# Altium PCB PCB1.PcbDoc
Units mm, origin at the board's own origin, x right, y up, seen from the top; angles counter-clockwise.
Board outline 152.4 x 101.6 mm, 2 copper layers (Top Layer, Bottom Layer); 23 components, 17 nets, 91 pads, 10 vias.
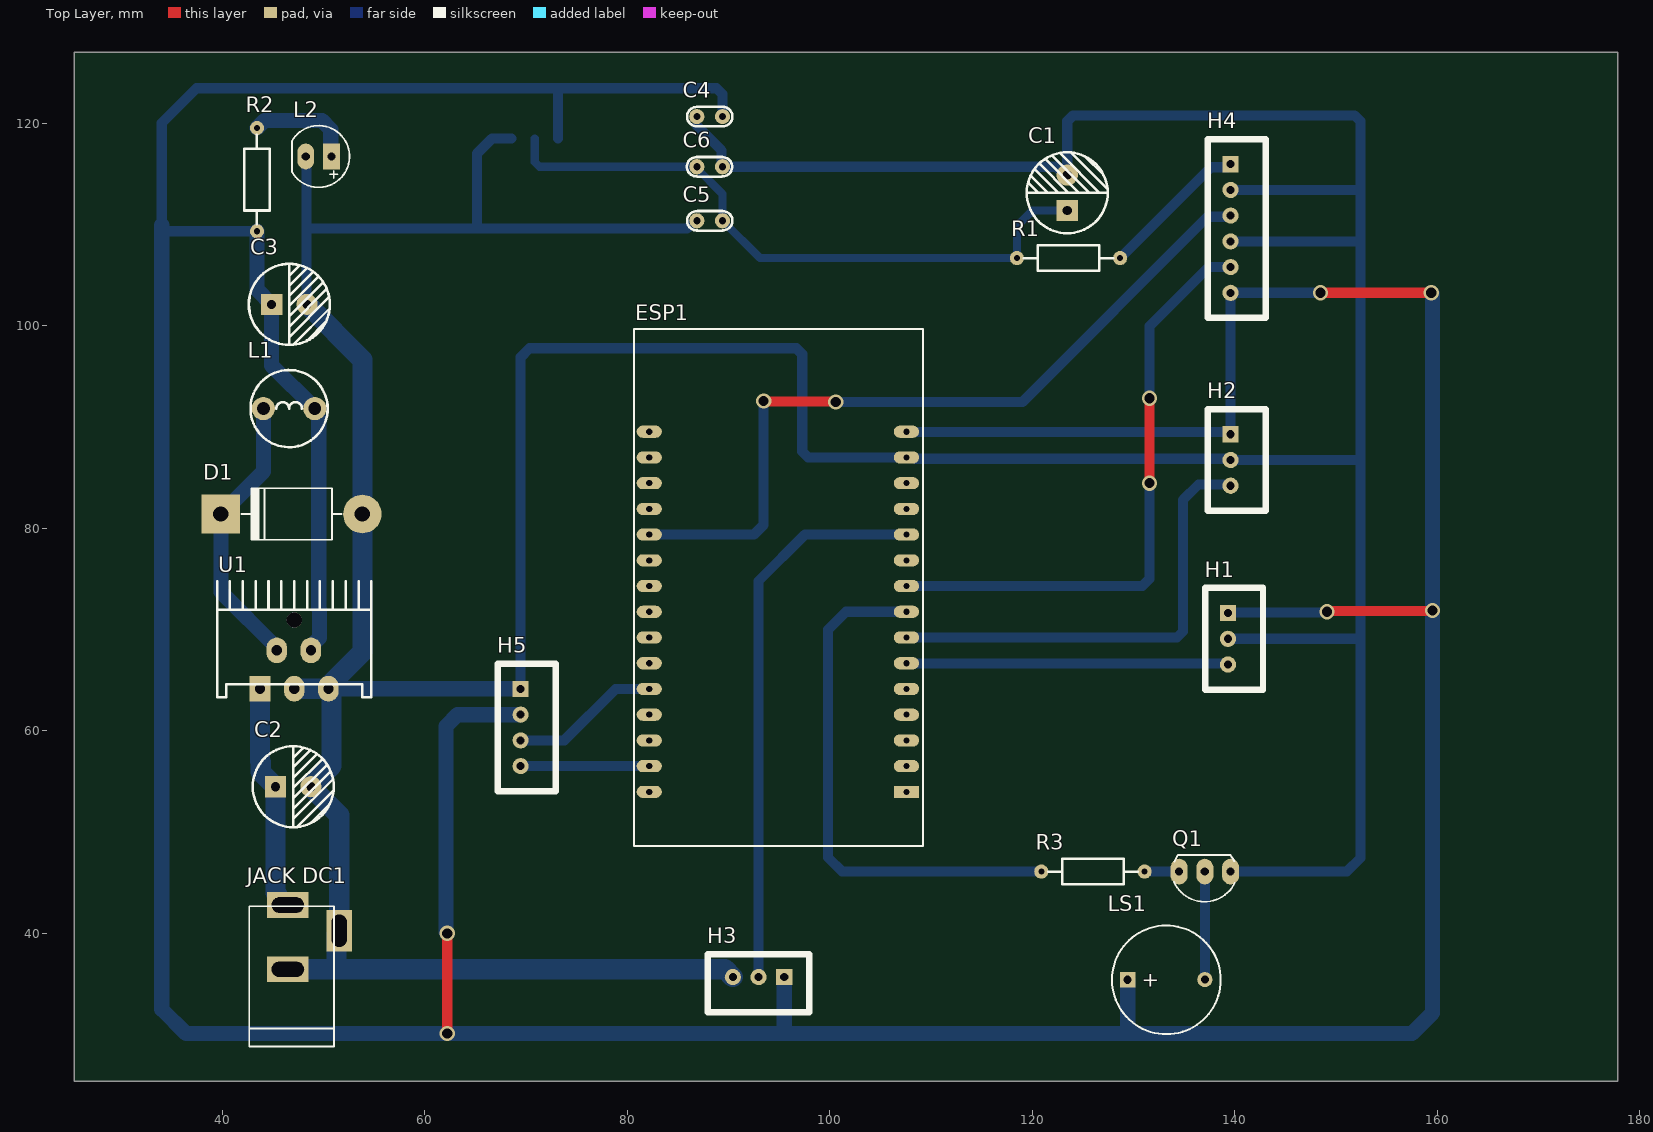
[diagram p0: Top Layer view]
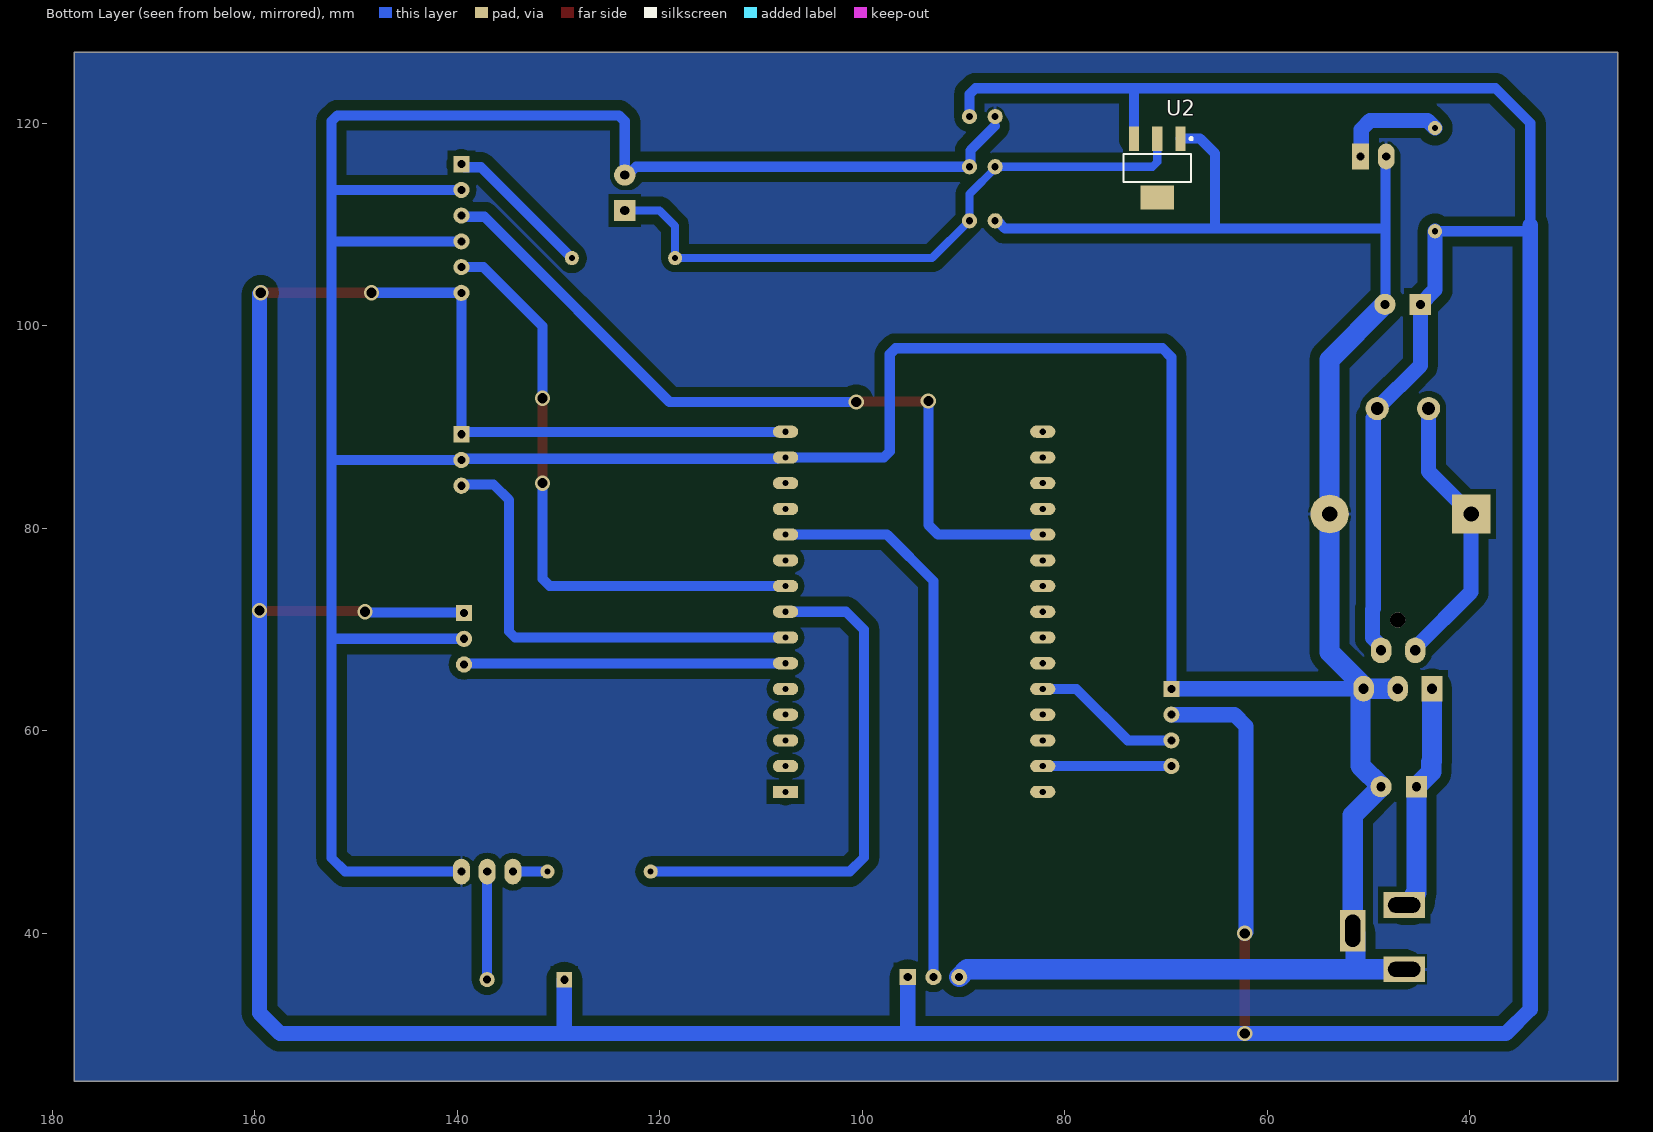
[diagram p1: Bottom Layer view, seen from below]
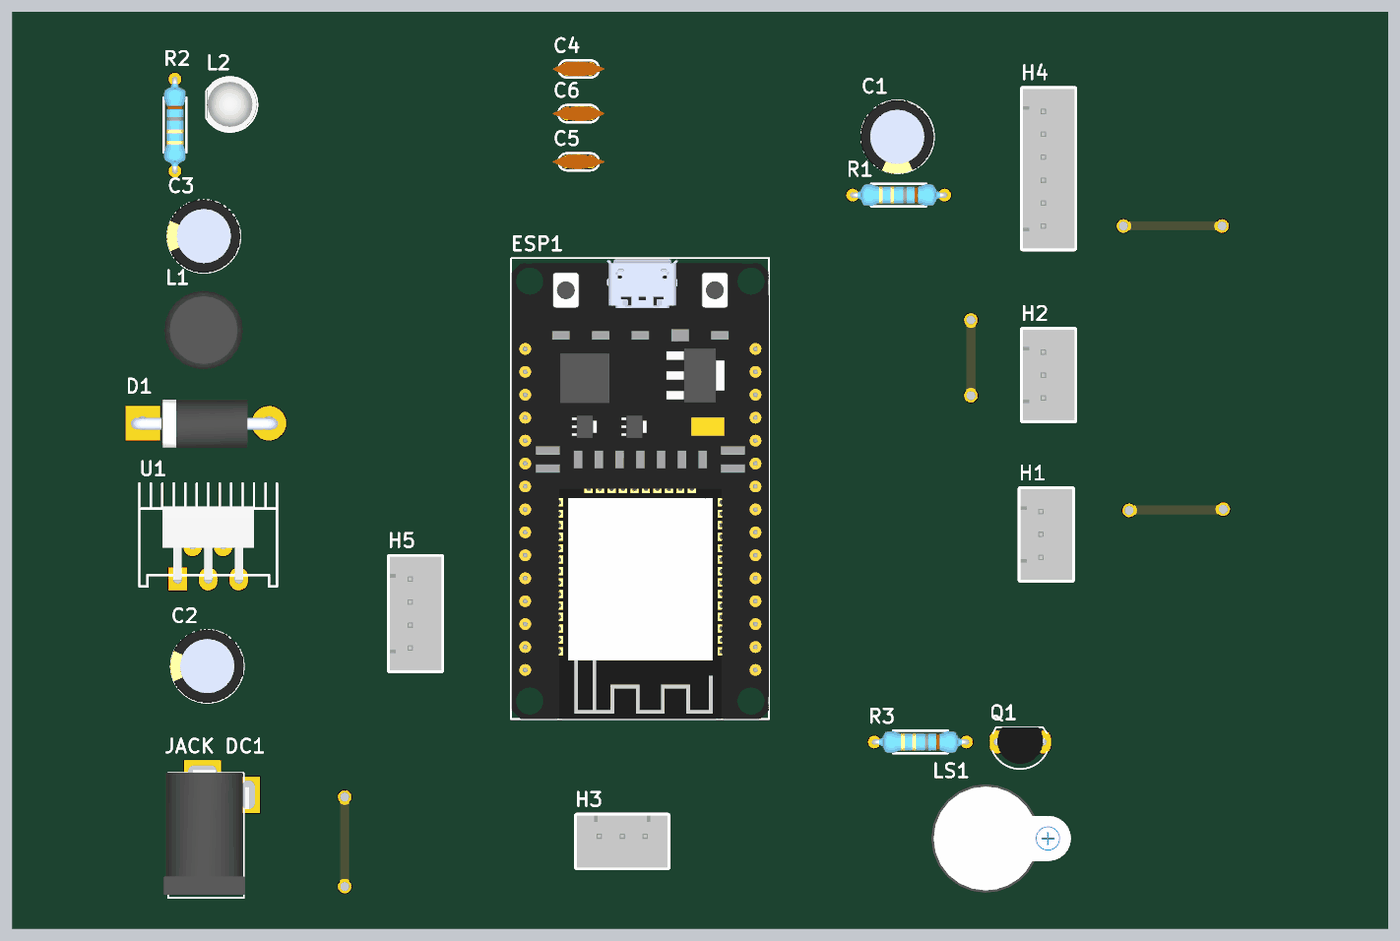
[diagram p2: 3D render of the assembled board from above, using the file's embedded part models]

## Layer stack, top to bottom
Top Solder: solder mask 0.0102, Solder Resist, Dk 3.5
Top Layer: signal copper 0.0356
Dielectric 1: dielectric 0.32, FR-4, Dk 4.8
Bottom Layer: signal copper 0.0356
Bottom Solder: solder mask 0.0102, Solder Resist, Dk 3.5

## Board outline
25.4,25.4 177.8,25.4 177.8,127 25.4,127

## Design rules (kind name [scope] priority, off if disabled: settings)
Clearance [All] p1: gap=1 ignorepadtopadclearanceinfootprint=FALSE except(0.6: Arc-SMDPad Arc-THPad Track-SMDPad Track-THPad SMDPad-SMDPad SMDPad-THPad SMDPad-Via SMDPad-Fill SMDPad-Poly SMDPad-Region THPad-THPad THPad-Via THPad-Fill THPad-Poly THPad-Region)
PolygonConnect [All] p1: connectstyle=Relief reliefconductorwidth=0.254 reliefentries=4 polygonreliefangle="90 Angle" airgapwidth=0.254
RoutingVias [All] p1: holewidth=1 width=2 viastyle="Through Hole" minholewidth=1 minwidth=2 maxholewidth=1 maxwidth=2
SolderMaskExpansion [All] p1: expansion=0.102 istentingtop=FALSE
Width 3.3V [InNet('+3.3')] p1: maxlimit=0.8 minlimit=0.8 preferedwidth=0.8
Width 5V [InNet('+5')] p2: maxlimit=1.5 minlimit=1 preferedwidth=1.5
Width 12V [InNet('+12')] p3: maxlimit=2 minlimit=1.5 preferedwidth=2
Width GND [InNet('GND')] p4: maxlimit=2 minlimit=1 preferedwidth=1.5
Width [All] p5: maxlimit=1.5 minlimit=1 preferedwidth=1.5
30 further rules are at their usual default settings.

## Components (designator, comment, footprint, x,y, rotation, side; value= is the part's Value field where it differs from the comment)
C1 "100uF" "tu hoa 8mm" 123.444,113.129 r90 top
C2 "470uF" "tu hoa 8mm" 47.018,54.483 r0 top
C3 "100uF" "tu hoa 8mm" 46.637,102.108 r0 top
C4 "104" "tu gom" 88.138,120.65 r180 top
C5 "104" "tu gom" 88.138,110.363 r180 top
C6 "104" "tu gom" 88.138,115.697 r0 top
D1 "1N5408" D5A 39.878,81.407 r0 top
ESP1 "ESP32 DEVKIT" "ESP32 WROOM 32 KIT" 107.569,53.975 r180 top
H1 "MP135" XH2.54M-3 139.319,71.628 r270 top
H2 "RAIN" XH2.54M-3 139.573,89.281 r270 top
H3 "DHT22" XH2.54M-3 95.504,35.687 r180 top
H4 "CAM_BIEN_BUI" XH2.54M-6 139.573,115.951 r270 top
H5 "LCD" XH2.54M-4 69.469,64.135 r270 top
"JACK DC1" "JACK DC 5.5" "JACK DC 5.5" 49.022,39.624 r90 top value="Jac DC"
L1 "100uH 3A" "CUON CAM 100uH3A" 46.609,91.821 r0 top
L2 "LED 5mm" LED-5MM-RED 50.8,116.713 r180 top
LS1 "Coi Chip Speaker" "Coi Chip Speacker" 129.413,35.42 r0 top
Q1 "C1815" TO92 137.033,46.101 r180 top value=C9014
R1 "330R" "tro vach 1/4w" 123.571,106.68 r0 top
R2 "330R" "tro vach 1/4w" 43.434,114.427 r90 top
R3 "1k" "tro vach 1/4w" 125.984,46.101 r0 top
U1 "LM2596T-5.0" LM2576t 47.092,68.402 r0 top
U2 "LM1117-3.3V" SOT223-4N 70.866,115.57 r270 bottom

## Footprints (in the part's own frame and the unit in brackets; to place one, negate y for a bottom-side part, rotate by r counter-clockwise, add the part's x,y. Pads: shape width x height; smd on the part's side, far side on the other; paste and mask are expansions set on the pad)
"Coi Chip Speacker" [mm]
  rect 1.5x1.5 hole 0.8: 1(0,0)
  round 1.5 hole 0.8: 2(7.62,0.013)
  silkscreen extent -1.55,-5.38 9.18,5.36, body extent -2.22,-6 13.24,6, height 4.5
"CUON CAM 100uH3A" [mil] "100uH3A"
  round 90 hole 50: 1(-100,0) 2(100,0)
  silkscreen extent -150,-150 150,150, body extent -171,-175 171,167, height 394
D5A [mil] "Diode 5A, W 200mil, L 550mil"
  round 150 hole 60: 1(550,0)
  rect 150x150 hole 60: 2(0,0)
  silkscreen extent 80,-100 470,100, body extent -52,-106 590,103, height 254
"ESP32 WROOM 32 KIT" [mm]
  rect 2.5x1.2 hole 0.6: 1(0,0)
  oval 2.5x1.2 hole 0.6: 2(0,-2.54) 3(0,-5.08) 4(0,-7.62) 5(0,-10.16) 6(0,-12.7) 7(0,-15.24) 8(0,-17.78) 9(0,-20.32) 10(0,-22.86) 11(0,-25.4) 12(0,-27.94) 13(0,-30.48) 14(0,-33.02) 15(0,-35.56) 16(25.4,-35.56) 17(25.4,-33.02) 18(25.4,-30.48) 19(25.4,-27.94) 20(25.4,-25.4) 21(25.4,-22.86) 22(25.4,-20.32) 23(25.4,-17.78) 24(25.4,-15.24) 25(25.4,-12.7) 26(25.4,-10.16) 27(25.4,-7.62) 28(25.4,-5.08) 29(25.4,-2.54) 30(25.4,0)
  silkscreen extent -1.65,-45.72 26.92,5.33, body extent -1.65,-45.6 26.85,5.33, height 10.49
"JACK DC 5.5" [mm] "Jac DC input"
  rect 2.54x4.064 hole 1.5 slot 3.2 at 90 deg: 1(3.175,2.54) 2(-3.175,2.54)
  rect 4.064x2.54 hole 1.5 slot 3.2 at 0 deg: 3(0.635,-2.54)
  silkscreen extent -10.79,-2.03 3.05,6.35, body extent -10.42,-2.67 3.4,6.84, height 11.02
LED-5MM-RED [mil] "LED 2 PIN, 5 ly , Only colour,pin to pin 100mil"
  rect 65x100 hole 32: 1(0,0)
  oval 65x100 hole 32: 2(100,0)
  silkscreen extent -70,-120 154,120, body extent -65,-119 149,118, height 339
LM2576t [mil]
  rect 80x100 hole 40: 1(-132,-167.09)
  oval 80x100 hole 40: 2(-67,-18) 3(1,-167) 4(66,-18) 5(134,-167)
  round 59.06 hole 59.06: ""(1,100)
  silkscreen extent -299,-200 301,250, body extent -199,-175 201,150, height 859
SOT223-4N [mm] "SOT223, 4-Leads, Body 6.5x3.5mm, Pitch 2.3mm, Lead Span 7mm, IPC Medium Density"
  rect 2.4x1 smd: 1(-2.9,2.3) 2(-2.9,0) 3(-2.9,-2.3)
  rect 2.4x3.3 smd: 4(2.9,0)
  silkscreen extent -3.02,-3.35 1.4,3.47, body extent -3.39,-3.27 3.5,3.23, height 1.72
TO92 [mil] "TO-92"
  oval 66x100 hole 32: 1(-100,0) 2(0,0) 3(100,0)
  silkscreen extent -117,-65 120,118, body extent -109,-66 109,95, height 245
"tro vach 1/4w" [mm]
  round 1.4 hole 0.6: 1(-5.1,0) 2(5.1,0)
  silkscreen extent -4.39,-1.25 4.42,1.25, body extent -5.38,-1.2 5.38,1.2, height 2.41
"tu gom" [mm] "Tu gom mini"
  round 1.5 hole 0.7: 1(-1.27,0) 2(1.27,0)
  silkscreen extent -2.25,-0.97 2.22,0.97, body extent -2.92,-0.85 2.92,0.85, height 6.12
"tu hoa 8mm" [mm]
  rect 2.1x2.1 hole 0.9: 1(-1.75,0)
  round 2.1 hole 0.9: 2(1.75,0)
  silkscreen extent -4,-4 4,4, body extent -4.1,-4.07 4.1,4.13, height 13.81
XH2.54M-3 [mm]
  rect 1.6x1.6 hole 0.8: 1(0,0)
  round 1.6 hole 0.8: 2(2.54,0) 3(5.08,0)
  silkscreen extent -2.48,-2.26 7.56,3.46, body extent -2.48,-2.26 7.56,3.48, height 6.91
XH2.54M-4 [mm]
  rect 1.6x1.6 hole 0.8: 1(0,0)
  round 1.6 hole 0.8: 2(2.54,0) 3(5.08,0) 4(7.62,0)
  silkscreen extent -2.48,-2.26 10.1,3.46, body extent -2.48,-2.26 10.1,3.48, height 6.91
XH2.54M-6 [mm]
  rect 1.6x1.6 hole 0.8: 1(0,0)
  round 1.6 hole 0.8: 2(2.54,0) 3(5.08,0) 4(7.62,0) 5(10.16,0) 6(12.7,0)
  silkscreen extent -2.48,-2.26 15.18,3.46, body extent -2.48,-2.26 15.18,3.48, height 6.91

## Part data
C1 C3: library part "Tu Hoa 100uF 50V 8x11", "Cắm", Chung_Loai=Cắm, Don_Vi=Con, Ma_Hang=MH006872, So_Chan=2, Ten_Linh_Kien="Tụ Hóa 100uF 50V 8x11MM"
C2: library part "Tu Hoa 470uF 25V 8x13", "Cắm", Chung_Loai=Cắm, Don_Vi=Con, Ma_Hang="MH 470uF 25V", So_Chan=2, Ten_Linh_Kien="Tụ Hóa 470uF 25V"
C4 C5 C6: library part "Tu gom 104 50V", "Cắm", Chung_Loai=Cắm, Don_Vi=Con, Ma_Hang=MH004761, So_Chan=2, Ten_Linh_Kien="Tụ gốm 104 100nF 50V"
D1: library part D5A, "Diode 5A"
ESP1: library part "ESP32 WROOM 32 KIT"
H1 H2 H3: library part "Header 3P 2.54 Duc Thang", "Cắm", Chung_Loai=Cắm, Don_Vi=Con, Ma_Hang=MH001292, Ten_Linh_Kien="Header 3P XH2.54-3P Đực Thẳng"
H4: library part "Header 6P 2.54 Duc Thang", "Cắm", Chung_Loai=Cắm, Don_Vi=Con, Ma_Hang=MH001972, Ten_Linh_Kien="Header 6P XH2.54-6P Đực Thẳng"
H5: library part "Header 4P 2.54 Duc Thang", "Cắm", Chung_Loai=Cắm, Don_Vi=Con, Ma_Hang=MH001285, Ten_Linh_Kien="Header 4P XH2.54-4P Đực Thẳng"
L1: library part "CUON CAM 100uH DIP", "Dán", Chung_Loai=Dán, Don_Vi=Con, Ma_Hang=MH002209, Ten_Linh_Kien="Cuộn Cảm 100uH 3A 8x10MM"
L2: library part "LED 5mm Do", "Cắm", Chung_Loai=Cắm, Don_Vi=Con, Ma_Hang=MH008967, Ten_Linh_Kien="Led 5MM Phủ Đỏ (1000c)"
LS1: "Còi chip"
Q1: library part "Trans C1815 DIP", "NPN transistor"
R1 R2: library part "Tro Vach 1/4W 5% 330R", "Cắm", Chung_Loai=Cắm, Don_Vi=Con, Ma_Hang=MH007436, So_Chan=2, Ten_Linh_Kien="Trở Vạch 1/4W 5% 330R"
R3: library part "Tro Vach 1/4W 5% 1k", "Cắm", Chung_Loai=Cắm, Don_Vi=Con, Ma_Hang=MH007390, So_Chan=2, Ten_Linh_Kien="Trở Vạch 1/4w 5% 1k"
U1: library part LM2576T-5.0, "SIMPLE SWITCHER; 3A Step-Down Voltage Regulator", DigiKeyPartNumber=LM2576T-5.0-ND, Manufacturer="National Semiconductor", PackageTopMarking="NSUZXYTT*LM2576T*-5.0 P+", PowerWise=N, Code_JEDEC=TO-220-AB, ComponentLink1Description="LM2576 Datasheet", ComponentLink1URL=http://www.national.com/ds/LM/LM2576.pdf, ComponentLink2Description="LM2576 Web Page", ComponentLink2URL=http://www.national.com/pf/LM/LM2576.html, ComponentLink3Description="T05A Package Page", ComponentLink3URL=http://www.national.com/packaging/folders/t05a.html, CompType=Switcher, DatasheetVersion=Aug-2004, FirstPublished=4-Dec-2008, PackageDescription="TO-220, Molded, 5 Lead, Straight", PackageReference=T05A, PackageVersion="revJ, Jan-1992", PartNumber=LM2576T-5.0, PinCount=5, Publisher="Altium Limited", RoHS=O
U2: library part LM1117, "800mA Low-Dropout Linear Regulator", Creator="Nguyen Ba Bien", Website=http://group3i.net

## Via types
v1: diameter 1.5, hole 1, Top Layer to Bottom Layer, 10 vias

## Nets (pads, with @x,y where several pads share a name; then routed paths per layer and width w, separated by ;. In a path a pad name is that pad's centre, name@x,y a point inside that pad or via, vN(x,y) a via of type N, cw(c..) or ccw(c..) an arc to the next point about the centre after c; other vN are vias at no path point)
+3.3: C1.1 C5.1 C6.1 R1.1 U2.2 | length 64.2
  Bottom Layer w0.8: U2.2 70.866,116.166 71.335,115.697 C6.1 ; C6.1@86.818,115.647 86.818,115.6 89.408,113.01 C5.1 93.091,106.68 R1.1 118.471,109.835 120.015,111.379 C1.1
+5: C3.1 C4.1 ESP1.15 H1.1 H2.1 H3.1 H4.6 H5.2 L1.2 LS1.1 R2.1 U1.4 U2.3 | length 538.5
  Top Layer w1: v1(62.23,30.099) v1(62.23,40.005) ; v1(148.463,103.251) v1(159.385,103.251) ; v1(149.098,71.755) 149.161,71.819 159.448,71.819 v1(159.512,71.882)
  Bottom Layer w1: R2.1 34.622,109.327 34.036,109.913 34.036,120.015 37.465,123.444 73.166,123.444 ; U2.3 73.166,123.444 ; C4.1 89.408,122.858 88.822,123.444 73.166,123.444 ; ESP1.15 107.607,89.497 H2.1@139.281,89.497 ; H2.1@139.192,89.408 H2.1@139.281,89.497 ; H1.1 139.382,71.691 149.034,71.691 v1(149.098,71.755) ; H2.1 139.357,89.497 H2.1@139.281,89.497 ; v1(148.463,103.251) H4.6 139.573,89.789 H2.1@139.281,89.497
  Bottom Layer w1.5: 34.036,109.913 34.036,32.512 36.449,30.099 v1(62.23,30.099) 95.631,30.099 ; R2.1 43.434,103.561 C3.1 44.887,96.083 L1.2 ; U1.4 48.768,68.343 49.617,69.192 49.617,71.978 49.53,72.065 L1.2@49.53,90.884 ; v1(62.23,40.005) 62.103,40.132 62.103,60.452 63.246,61.595 H5.2 ; H3.1 95.504,30.226 95.631,30.099 ; LS1.1 129.413,30.226 129.54,30.099 ; v1(159.385,103.251) 159.512,103.124 v1(159.512,71.882) 159.512,32.131 157.48,30.099 129.54,30.099 ; 95.631,30.099 129.54,30.099
+12: "JACK DC1.1" C2.1 U1.1 | length 22.9
  Bottom Layer w2: U1.1 43.739,56.972 43.815,56.896 43.815,55.936 C2.1 45.268,44.013 45.45,43.831 45.45,43.069 45.72,42.799 46.482,42.799
BUZZER: ESP1.8 R3.1 | length 52.6
  Bottom Layer w1: ESP1.8 101.6,71.755 99.822,69.977 99.822,47.498 101.219,46.101 R3.1
D4: ESP1.20 H4.3 | length 77.7
  Top Layer w1: v1(93.472,92.583) 93.535,92.519 100.52,92.519 v1(100.584,92.456)
  Bottom Layer w1: ESP1.20 92.505,79.375 93.472,80.342 v1(93.472,92.583) ; v1(100.584,92.456) 118.999,92.456 137.299,110.756 139.458,110.756 H4.3
D26: ESP1.9 H4.5 | length 59.7
  Top Layer w1: v1(131.572,84.455) v1(131.572,92.837)
  Bottom Layer w1: ESP1.9 130.859,74.295 131.572,75.008 v1(131.572,84.455) ; v1(131.572,92.837) 131.572,99.949 137.414,105.791 H4.5
DHT22: ESP1.11 H3.2 | length 55.6
  Bottom Layer w1: H3.2 92.964,74.803 97.536,79.375 ESP1.11
GND: "JACK DC1.2" "JACK DC1.3" C1.2 C2.2 C3.2 C4.2 C5.2 C6.2 D1.1 ESP1.14 H1.2 H2.2 H3.3 H4.2 H4.4 H5.1 L2.2 Q1.1 U1.3 U1.5 U2.1 | length 527.6
  Bottom Layer w0.8: L2.2 L2.2@48.323,116.649 ; C3.2@48.323,102.171 C3.2 ; C5.2@86.679,110.363 C5.2
  Bottom Layer w1: C3.2@48.323,102.171 48.323,109.601 ; L2.2@48.323,116.649 48.323,109.601 ; U2.1 66.636,118.47 65.151,116.985 65.151,109.601 ; H5.1 69.469,96.901 70.341,97.773 96.696,97.773 97.282,97.187 97.282,87.581 97.868,86.995 ESP1.14 108.273,86.995 108.4,86.868 139.022,86.868 139.034,86.856 139.458,86.856 H2.2 152.273,86.741 152.4,86.614 ; C5.2@86.679,110.363 85.917,109.601 65.151,109.601 ; 86.914,119.715 89.312,117.317 89.312,115.793 C6.2 122.328,115.697 123.146,114.879 C1.2 123.444,120.191 124.03,120.777 151.814,120.777 152.4,120.191 152.4,113.411 ; H1.2 152.273,69.088 152.4,68.961 ; Q1.1 151.052,46.101 152.4,47.449 152.4,68.961 ; H4.4 152.146,108.331 152.4,108.077 ; H4.2 152.4,113.411 ; 48.323,109.601 65.151,109.601 ; 152.4,68.961 152.4,86.614 ; 152.4,86.614 152.4,108.077 ; 152.4,108.077 152.4,113.411
  Bottom Layer w1.5: U1.5 50.508,64.148 69.456,64.148 H5.1
  Bottom Layer w2: 46.482,36.449 89.662,36.449 H3.3 ; U1.3 U1.5 ; C3.2 53.848,96.647 D1.1 53.848,67.767 50.495,64.414 U1.5 ; 51.292,37.478 51.292,39.989 51.562,40.259 51.562,51.662 48.768,54.456 C2.2 48.768,54.51 50.8,56.542 50.8,63.593 50.495,63.898 U1.5
MP135: ESP1.6 H1.3 | length 31.8
  Bottom Layer w1: ESP1.6 107.607,66.637 139.23,66.637 H1.3
NetD1_2: D1.2 L1.1 U1.2 | length 27.9
  Bottom Layer w1.5: L1.1 44.069,85.598 D1.2 39.878,73.711 45.39,68.199 U1.2
NetH4_1: H4.1 R1.2 | length 14.7
  Bottom Layer w1: R1.2 137.642,115.651 139.273,115.651 H4.1
NetL2_1: L2.1 R2.2 | length 10.7
  Bottom Layer w1.5: R2.2 44.176,120.269 49.846,120.269 50.725,119.39 50.725,116.788 L2.1
NetLS1_2: LS1.2 Q1.2 | length 10.7
  Bottom Layer w1: LS1.2 Q1.2
NetQ1_3: Q1.3 R3.2 | length 3.4
  Bottom Layer w1: R3.2@131.074,46.111 R3.2 Q1.3 Q1.3@134.483,46.091
RAIN: ESP1.7 H2.3 | length 45.9
  Bottom Layer w1: ESP1.7 134.288,69.215 134.874,69.801 134.874,82.804 136.398,84.328 139.022,84.328 139.034,84.316 139.458,84.316 H2.3
SCL: ESP1.29 H5.4 | length 12.7
  Bottom Layer w1: H5.4 ESP1.29
SDA: ESP1.26 H5.3 | length 14.8
  Bottom Layer w1: H5.3 73.787,59.055 78.867,64.135 ESP1.26
pads on no net: ESP1.1 ESP1.2 ESP1.3 ESP1.4 ESP1.5 ESP1.10 ESP1.12 ESP1.13 ESP1.16 ESP1.17 ESP1.18 ESP1.19 ESP1.21 ESP1.22 ESP1.23 ESP1.24 ESP1.25 ESP1.27 ESP1.28 ESP1.30 U1. U2.4

## Polygon pours and split planes (outlines as drawn)
GND on Bottom Layer "GND_L02_P001" (solid, remove dead copper, pour order 1): 25.4,127 177.8,127 177.8,25.4 25.4,25.4

## Text inside footprints (layer, text, board x,y; h text height)
LS1: Top Overlay "+" at 130.823,34.709 h1.52